# Altium PCB mimosa_simple_button.PcbDoc
Units mil, origin at the board's own origin, x right, y up, seen from the top; angles counter-clockwise.
Board outline 519.69 x 1220.47 mil, 4 copper layers (Top Layer, Layer 1, Layer 2, Bottom Layer), stack 29.856 mil thick; 30 components, 13 nets, 78 pads, 52 vias.
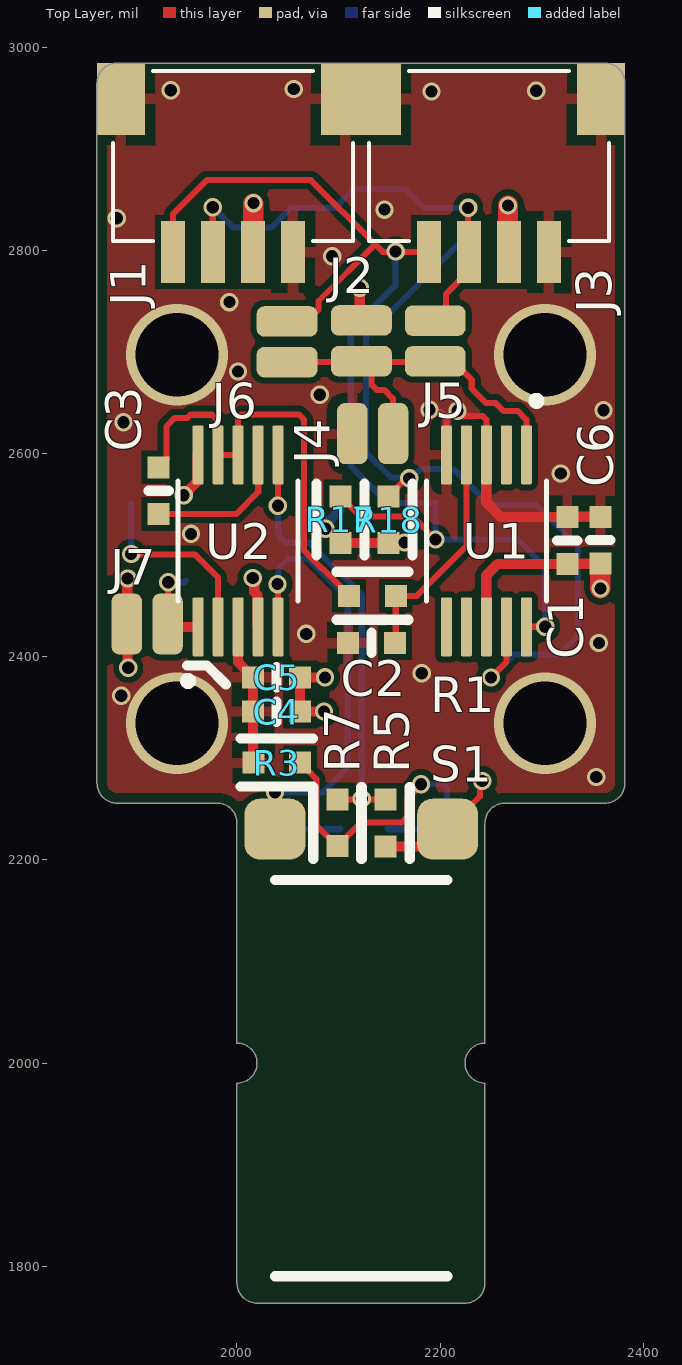
[diagram p0: Top Layer view]
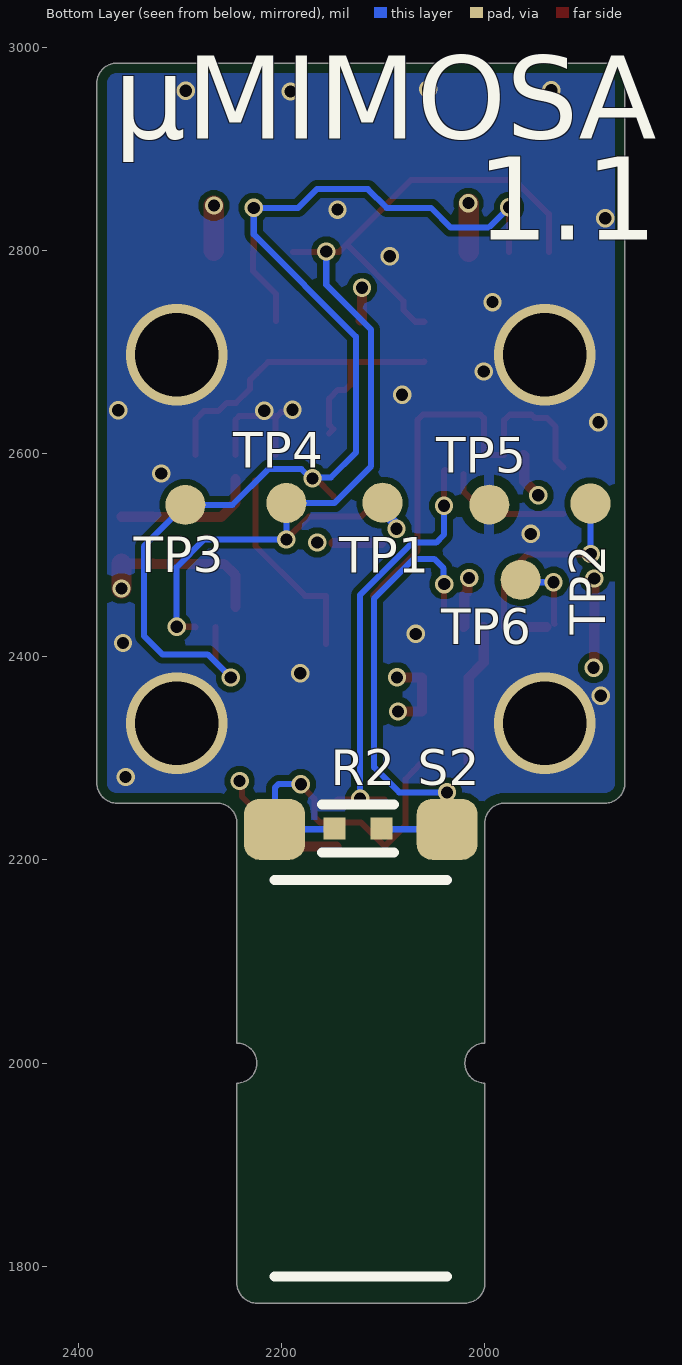
[diagram p1: Bottom Layer view, seen from below]
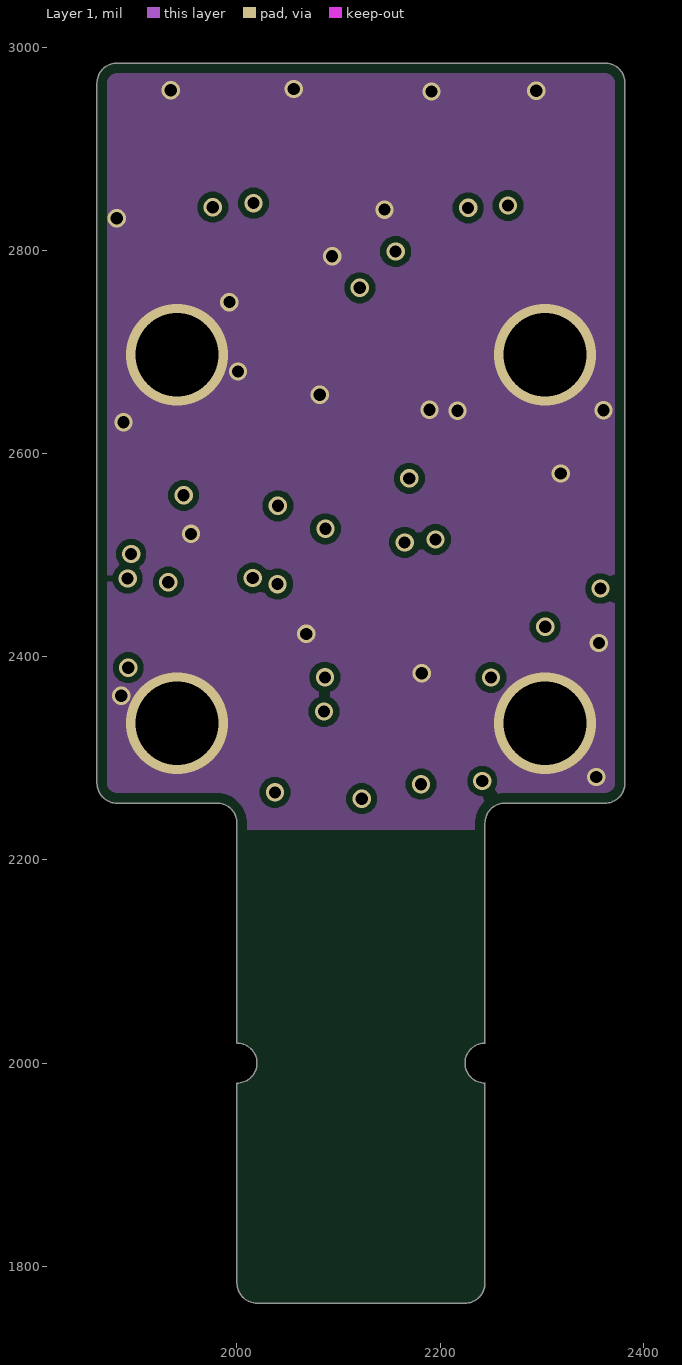
[diagram p2: Layer 1]
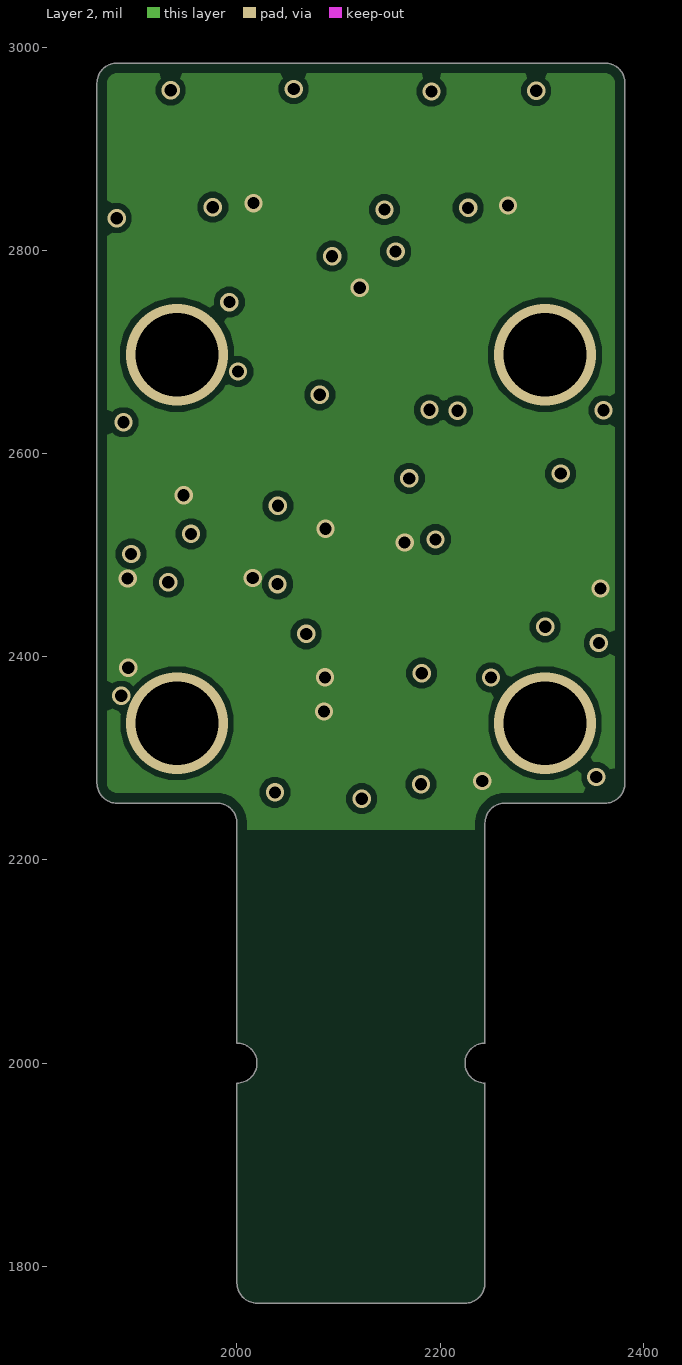
[diagram p3: Layer 2]
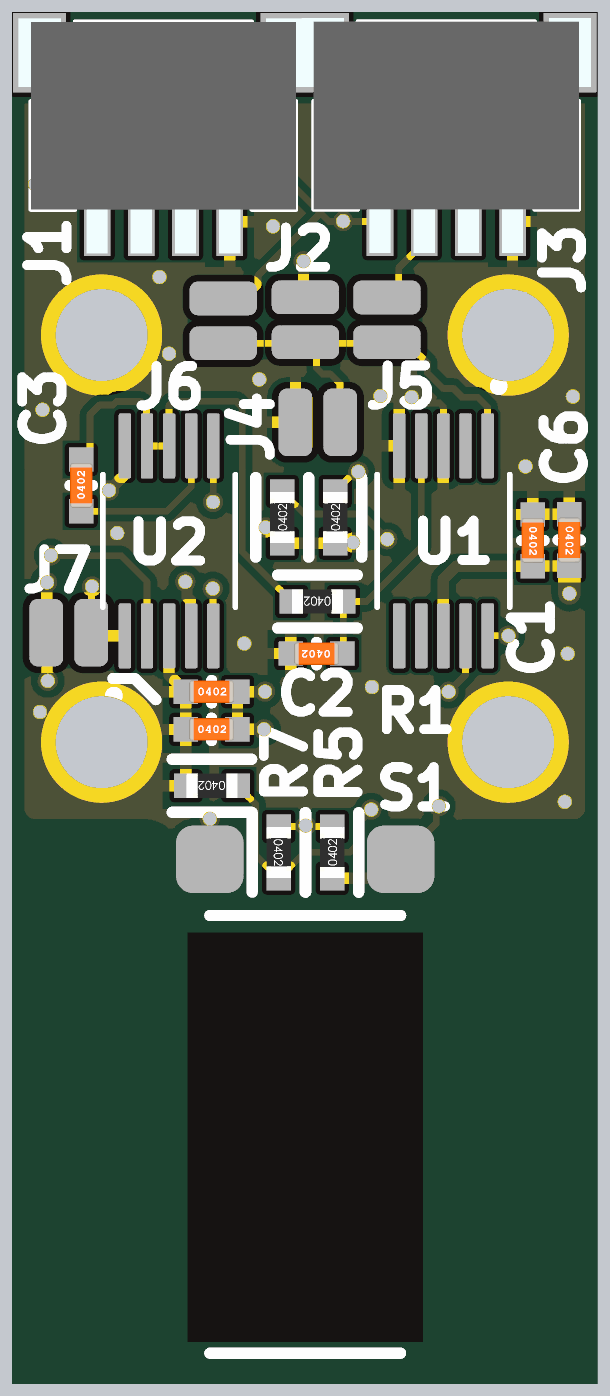
[diagram p4: 3D render of the assembled board from above, using the file's embedded part models]

## Layer stack, top to bottom
Top Solder: solder mask 0.4, Solder Resist, Dk 3.5
Top Layer: signal copper 1.4
Dielectric 2: prepreg 4.3, PP-006, Dk 4.1
Layer 1: signal copper 1.378
Dielectric 1: dielectric 15.7, FR-4, Dk 4.4
Layer 2: signal copper 1.378
Dielectric 3: prepreg 4.3, PP-006, Dk 4.1
Bottom Layer: signal copper 1.4
Bottom Solder: solder mask 0.4, Solder Resist, Dk 3.5

## Board outline
1881.89,2255.91 cw(c1881.89,2275.59) 1862.2,2275.59 1862.2,2964.57 cw(c1881.89,2964.57) 1881.89,2984.25 2362.2,2984.25 cw(c2362.2,2964.57) 2381.89,2964.57 2381.89,2275.59 cw(c2362.2,2275.59) 2362.2,2255.91 2263.78,2255.91 ccw(c2263.78,2236.22) 2244.09,2236.22 2244.09,2019.68 ccw(c2244.09,2000) 2244.09,1980.32 2244.09,1783.46 cw(c2224.41,1783.46) 2224.41,1763.78 2019.68,1763.78 cw(c2019.68,1783.46) 2000,1783.46 2000,1980.32 ccw(c2000,2000) 2000,2019.68 2000,2236.22 ccw(c1980.32,2236.22) 1980.32,2255.91

## Design rules (kind name [scope] priority, off if disabled: settings)
BoardOutlineClearance [All] p1: gap=10 ignorepadtopadclearanceinfootprint=FALSE except(0: Arc-SplitContinuation Track-SplitContinuation SMDPad-SplitContinuation THPad-SplitContinuation Via-SplitContinuation Fill-SplitContinuation Poly-SplitContinuation Region-SplitContinuation Text-SplitContinuation)
Clearance [All] p1: gap=6 ignorepadtopadclearanceinfootprint=FALSE
ComponentClearance [All] p1: gap=10 collisioncheckmode=3 verticalgap=10 showdistances=FALSE donotcheckwithout3dbody=TRUE
DiffPairsRouting [All] p1: maxlimit=8 minlimit=4 mostfreqgap=5 toplayer_minwidth=5 toplayer_maxwidth=25 toplayer_prefwidth=9 midlayer1_minwidth=5 midlayer1_maxwidth=25 midlayer1_prefwidth=9 midlayer2_minwidth=5 midlayer2_maxwidth=25 midlayer2_prefwidth=9 bottomlayer_minwidth=5 bottomlayer_maxwidth=25 bottomlayer_prefwidth=9 maxuncoupledlength=500
HoleSize [All] p1: absolutevalues=TRUE maxlimit=100 minlimit=7 maxpercent=80.000 minpercent=20.000
MinimumSolderMaskSliver [All] p1: minsoldermaskwidth=0
PolygonConnect PolygonConnect_1 [All] p1: thpad.connectstyle=Relief thpad.reliefconductorwidth=10 thpad.reliefentries=4 thpad.polygonreliefangle="90 Angle" thpad.airgapwidth=10 smdpad.connectstyle=Relief smdpad.reliefconductorwidth=10 smdpad.reliefentries=4 smdpad.polygonreliefangle="90 Angle" smdpad.airgapwidth=10 via.connectstyle=Direct via.reliefconductorwidth=10 via.reliefentries=4 via.polygonreliefangle="90 Angle" via.airgapwidth=10
RoutingVias [All] p1: holewidth=8 width=50 viastyle="Through Hole" minholewidth=7 minwidth=10 maxholewidth=100 maxwidth=200
SilkToSilkClearance [All] p1: silktosilkclearance=1
SilkToSolderMaskClearance [IsPad] p1: minsilkscreentomaskgap=1 clearancetoexposedcopper=TRUE
SolderMaskExpansion [All] p1: expansion=4 istentingtop=FALSE
Width [All] p1: maxlimit=100 minlimit=4 preferedwidth=10 toplayer_minwidth=6 toplayer_prefwidth=6 midlayer1_minwidth=10 midlayer1_maxwidth=10 midlayer2_minwidth=10 midlayer2_maxwidth=10 bottomlayer_prefwidth=6 minimp=50.000000 maximp=50.000000 favimp=50.000000
24 further rules are at their usual default settings.

## Components (designator, comment, footprint, x,y, rotation, side; value= is the part's Value field where it differs from the comment)
C1 "1µF" SMD-0402C 2325.12,2514.42 r180 top
C2 "0.10µF" SMD-0402C 2132.42,2413.56 r90 top
C3 "12pF" SMD-0402C 1922.77,2563.44 r0 top
C4 "1µF" SMD-0402C 2038.88,2346.04 r270 top
C5 "0.10µF" SMD-0402C 2038.99,2379.61 r270 top
C6 "0.10µF" SMD-0402C 2357.56,2514.73 r180 top
J1 "SM04B-SRSS-TB(LF)(SN)" 4208 1996.99,2976.03 r180 top
J2 "solder bridge jumper, open" JUMPER1P5MMX1P5MM_OPEN 2122.5,2710.95 r90 top
J3 "SM04B-SRSS-TB(LF)(SN)" 4208 2249,2976.19 r180 top
J4 "solder bridge jumper, open" JUMPER1P5MMX1P5MM_OPEN 2133.59,2619.59 r180 top
J5 "solder bridge jumper, open" JUMPER1P5MMX1P5MM_OPEN 2195.12,2710.8 r90 top
J6 "solder bridge jumper, open" JUMPER1P5MMX1P5MM_OPEN 2049.3,2709.96 r90 top
J7 "solder bridge jumper, open" JUMPER1P5MMX1P5MM_OPEN 1911.65,2432.19 r180 top
R1 "0.0" SMD-0402-RES 2133.26,2459.95 r90 top
R2 "348" SMD-0402-RES 2124.99,2230.96 r90 bottom
R3 "0.0" SMD-0402-RES 2039.2,2295.81 r90 top
R5 "348" SMD-0402-RES 2146.36,2236.37 r0 top
R7 "348" SMD-0402-RES 2098.68,2236.49 r180 top
R17 "4.7k" SMD-0402-RES 2101.86,2534.94 r0 top
R18 "4.7k" SMD-0402-RES 2148.99,2534.94 r0 top
S1 "350 Ohm, Strain Gauge Sensor" BF350-3AA-NARROW 2122.34,2190.25 r270 top
S2 "350 Ohm, Strain Gauge Sensor" BF350-3AA-NARROW 2122.13,2190.15 r270 bottom
TP1 "TP-SM-C-100" TP-SM-C-100 2100.8,2551.59 r180 bottom
TP2 "TP-SM-C-100" TP-SM-C-100 1896.08,2550.76 r90 bottom
TP3 "TP-SM-C-100" TP-SM-C-100 2294.77,2549.44 r90 bottom
TP4 "TP-SM-C-100" TP-SM-C-100 2195.36,2551.28 r90 bottom
TP5 "TP-SM-C-100" TP-SM-C-100 1995.62,2549.74 r90 bottom
TP6 "TP-SM-C-100" TP-SM-C-100 1964.73,2475.67 r90 bottom
U1 "ADS1115IDGST" SOP50P490X110-10N 2245.45,2513.99 r270 top
U2 "PGA308AIDGST" SOP50P490X110-10N 2001.07,2513.93 r90 top

## Footprints (in the part's own frame and the unit in brackets; to place one, negate y for a bottom-side part, rotate by r counter-clockwise, add the part's x,y. Pads: shape width x height; smd on the part's side, far side on the other; paste and mask are expansions set on the pad)
4208 [mm]
  rect 0.6x1.55 smd: 1(-1.475,4.515) 2(-0.475,4.515) 3(0.525,4.515) 4(1.525,4.515)
  rect 1.2x1.8 smd: 5(-2.775,0.69) 6(2.825,0.69)
  silkscreen extent -2.97,-0.01 3.03,4.24, body extent -3.25,-0.09 3.31,5.23, height 3.15
BF350-3AA-NARROW [mil]
  rrect50% 60x60 smd mask-4: 1(-40,85) 2(-40,-85)
  silkscreen extent 10,-85 400,85
JUMPER1P5MMX1P5MM_OPEN [mil]
  rrect50% 30x60 smd mask+6: 1(-20,0) 2(20,0)
SMD-0402-RES [mm]
  rect 0.55x0.55 smd: 1(0,0.584) 2(0,-0.584)
  silkscreen extent -0.6,-0.9 0.6,0.9, body extent -0.28,-0.57 0.27,0.58, height 0.41
SMD-0402C [mm]
  rect 0.55x0.55 smd: 1(0,0.584) 2(0,-0.584)
  silkscreen extent -0.25,0 0.25,0, body extent -0.25,-0.51 0.25,0.51, height 0.51
SOP50P490X110-10N [mm]
  rrect25% 1.47x0.28 smd: 1(-2.15,1) 2(-2.15,0.5) 3(-2.15,0) 4(-2.15,-0.5) 5(-2.15,-1) 6(2.15,-1) 7(2.15,-0.5) 8(2.15,0) 9(2.15,0.5) 10(2.15,1)
  silkscreen extent -3.6,-1.5 1.5,1.5
TP-SM-C-100 [mm]
  round 1 smd: 1(0,0)

## Part data
C1 C4: library part GRM155R61A105KE15D, "CAP CER 1UF 10V X5R 0402", Digi-Key Part Number=490-3890-1-ND, Manufacturer="Murata Electronics North America", Operating Temperature="-55°C ~ 85°C", Package / Case="0402 (1005 Metric)", Ratings=-, Temperature Coefficient=X5R, Tolerance=±10%, Voltage=10V, @ qty=0, Applications="General Purpose", Datasheets=http://www.murata.com/~/media/webrenewal/support/library/catalog/products/capacitor/mlcc/c02e.pdf, Factory Stock=0, Features=-, Height - Seated (Max)=-, Image=//media.digikey.com/Renders/Murata%20Renders/ZRB-SERIES-0402.jpg, Lead Spacing=-, Lead Style=-, Minimum Quantity=1, Mounting Type="Surface Mount, MLCC", Packaging="Cut Tape (CT)", Part Number=GRM155R61A105KE15D, Part Status=Active, Quantity Available=6162668, Series=GRM, Size / Dimension="0.039\" L x 0.020\" W (1.00mm x 0.50mm)", Thickness (Max)="0.022\" (0.55mm)", Unit Price (USD)=0.1
C2: library part GCM155R71C104KA55D, "CAP CER 0.1UF 16V X7R 0402", Digi-Key Part Number=490-4759-1-ND, Manufacturer="Murata Electronics North America", Operating Temperature="-55°C ~ 125°C", Package / Case="0402 (1005 Metric)", Ratings=AEC-Q200, Temperature Coefficient=X7R, Tolerance=±10%, Voltage=16V, @ qty=0, Applications=Automotive, Datasheets=http://www.murata.com/~/media/webrenewal/support/library/catalog/products/capacitor/mlcc/c03e.ashx, Factory Stock=0, Features=-, Height - Seated (Max)=-, Image=//media.digikey.com/Renders/Murata%20Renders/ZRB-SERIES-0402.jpg, Lead Spacing=-, Lead Style=-, Minimum Quantity=1, Mounting Type="Surface Mount, MLCC", Packaging="Cut Tape (CT)", Part Number=GCM155R71C104KA55D, Part Status=Active, Quantity Available=734194, Series=GCM, Size / Dimension="0.039\" L x 0.020\" W (1.00mm x 0.50mm)", Thickness (Max)="0.022\" (0.55mm)", Unit Price (USD)=0.1
C3: library part GCM1555C1H120JA16D, "CAP CER 12PF 50V NP0 0402", Digi-Key Part Number=490-12649-1-ND, Manufacturer="Murata Electronics North America", Operating Temperature="-55°C ~ 125°C", Package / Case="0402 (1005 Metric)", Ratings=AEC-Q200, Temperature Coefficient="C0G, NP0", Tolerance=±5%, Voltage=50V, @ qty=0, Applications=Automotive, Datasheets=http://www.murata.com/~/media/webrenewal/support/library/catalog/products/capacitor/mlcc/c03e.ashx, Factory Stock=0, Features=-, Height - Seated (Max)=-, Image=//media.digikey.com/Renders/Murata%20Renders/ZRB-SERIES-0402.jpg, Lead Spacing=-, Lead Style=-, Minimum Quantity=1, Mounting Type="Surface Mount, MLCC", Packaging="Cut Tape (CT)", Part Number=GCM1555C1H120JA16D, Part Status=Active, Quantity Available=29045, Series=GCM, Size / Dimension="0.039\" L x 0.020\" W (1.00mm x 0.50mm)", Thickness (Max)="0.022\" (0.55mm)", Unit Price (USD)=0.1
C5 C6: library part GRM152R61A104KE19D, "CAP CER 0.1UF 10V X5R 0402", Digi-Key Part Number=490-10008-1-ND, Manufacturer="Murata Electronics North America", Operating Temperature="-55°C ~ 85°C", Package / Case="0402 (1005 Metric)", Ratings=-, Temperature Coefficient=X5R, Tolerance=±10%, Voltage=10V, @ qty=0, Applications="General Purpose", Datasheets=http://www.murata.com/~/media/webrenewal/support/library/catalog/products/capacitor/mlcc/c02e.pdf, Factory Stock=0, Features="Derating Recommended", Height - Seated (Max)=-, Image=//media.digikey.com/Renders/Murata%20Renders/ZRB-SERIES-0402.jpg, Lead Spacing=-, Lead Style=-, Minimum Quantity=1, Mounting Type="Surface Mount, MLCC", Packaging="Cut Tape (CT)", Part Number=GRM152R61A104KE19D, Part Status=Active, Quantity Available=80241, Series=GRM, Size / Dimension="0.039\" L x 0.020\" W (1.00mm x 0.50mm)", Thickness (Max)="0.009\" (0.22mm)", Unit Price (USD)=0.16
J1 J3: library part 4208
J2 J4 J5 J6 J7: library part jumper_open
R1 R3: library part ERJ-2GE0R00X, "RES SMD 0.0OHM JUMPER 1/10W 0402", Digi-Key Part Number=P0.0JCT-ND, Manufacturer="Panasonic Electronic Components", Operating Temperature="-55°C ~ 155°C", Package / Case="0402 (1005 Metric)", Power (Watts)="0.1W, 1/10W", Supplier Device Package=0402, Temperature Coefficient=-, Tolerance=Jumper, @ qty=1500, Composition="Thick Film", Datasheets=http://industrial.panasonic.com/www-cgi/jvcr13pz.cgi?E+PZ+3+AOA0001+ERJ2GE0R00X+7+WW, Factory Stock=0, Failure Rate=-, Features="Automotive AEC-Q200", Height - Seated (Max)="0.016\" (0.40mm)", Image=//media.digikey.com/Photos/Panasonic%20Photos/ERJ-PA2-Series.jpg, Minimum Quantity=1, Number of Terminations=2, Packaging="Cut Tape (CT)", Part Number=ERJ-2GE0R00X, Part Status=Active, Quantity Available=3152483, Series=ERJ, Size / Dimension="0.039\" L x 0.020\" W (1.00mm x 0.50mm)", Unit Price (USD)=0.00384
R2 R5 R7: library part ERJ-2RKF3480X, "RES SMD 348 OHM 1% 1/10W 0402", Digi-Key Part Number=P348LCT-ND, Manufacturer="Panasonic Electronic Components", Operating Temperature="-55°C ~ 155°C", Package / Case="0402 (1005 Metric)", Power (Watts)="0.1W, 1/10W", Supplier Device Package=0402, Temperature Coefficient=±100ppm/°C, Tolerance=±1%, @ qty=1500, Composition="Thick Film", Datasheets=http://industrial.panasonic.com/www-cgi/jvcr13pz.cgi?E+PZ+3+AOA0002+ERJ2RKF3480X+7+WW, Factory Stock=0, Failure Rate=-, Features="Automotive AEC-Q200", Height - Seated (Max)="0.016\" (0.40mm)", Image=//media.digikey.com/Photos/Panasonic%20Photos/ERJ-PA2-Series.jpg, Minimum Quantity=1, Number of Terminations=2, Packaging="Cut Tape (CT)", Part Number=ERJ-2RKF3480X, Part Status=Active, Quantity Available=73385, Series=ERJ, Size / Dimension="0.039\" L x 0.020\" W (1.00mm x 0.50mm)", Unit Price (USD)=0.00408
R17 R18: library part ERJ-2GEJ472X, "RES SMD 4.7K OHM 5% 1/10W 0402", Digi-Key Part Number=P4.7KJCT-ND, Manufacturer="Panasonic Electronic Components", Operating Temperature="-55°C ~ 155°C", Package / Case="0402 (1005 Metric)", Power (Watts)="0.1W, 1/10W", Supplier Device Package=0402, Temperature Coefficient=±200ppm/°C, Tolerance=±5%, @ qty=1500, Composition="Thick Film", Datasheets=http://industrial.panasonic.com/www-cgi/jvcr13pz.cgi?E+PZ+3+AOA0001+ERJ2GEJ472X+7+WW, Factory Stock=0, Failure Rate=-, Features="Automotive AEC-Q200", Height - Seated (Max)="0.016\" (0.40mm)", Image=//media.digikey.com/Photos/Panasonic%20Photos/ERJ-PA2-Series.jpg, Minimum Quantity=1, Number of Terminations=2, Packaging="Cut Tape (CT)", Part Number=ERJ-2GEJ472X, Part Status=Active, Quantity Available=8551774, Series=ERJ, Size / Dimension="0.039\" L x 0.020\" W (1.00mm x 0.50mm)", Unit Price (USD)=0.00350
S1 S2: library part BF350-3AA
TP1 TP2 TP3 TP4 TP5 TP6: library part CMP-0484-00002-2, "Test Point, Surface Mount, Circular, Pad Diameter 1 mm", Manufacturer="No Vendor", Manufacturer 1=ALTIUM, Manufacturer 2="No Vendor", Manufacturer Part Number 1=TP-SM-C-100, Manufacturer Part Number 2=TP-SM-C-100, PartNumber=TP-SM-C-100
U1: library part ADS1015IDGST, "12-Bit, 3.3kSPS, 4-Ch Delta-Sigma ADC With PGA, Oscillator, VREF, Comparator and I2C Interface 10-VSSOP -40 to 125", Package="VSSOP-10 Texas Instruments", Availability=Good, DigiKey-Purchase-URL=https://snapeda.com/shop?store=DigiKey&id=425936, MF="Texas Instruments", Mouser-Purchase-URL=https://snapeda.com/shop?store=Mouser&id=425936, MP=ADS1015IDGST, Price=None, SnapEDA_Link=https://www.snapeda.com/parts/ADS1015IDGST/Texas%20Instruments/view-part/425936/?ref=snap, Texas_Instruments-Purchase-URL=https://snapeda.com/shop?store=Texas+Instruments&id=425936
U2: Package=None, Availability=Unavailable, MP=PGA308AIDGST, Price=None

## Via types
v1: diameter 18, hole 12, Top Layer to Bottom Layer, tented both sides, 48 vias
v2: diameter 100, hole 82, Top Layer to Bottom Layer, 4 vias

## Nets (pads, with @x,y where several pads share a name; then routed paths per layer and width w, separated by ;. In a path a pad name is that pad's centre, name@x,y a point inside that pad or via, vN(x,y) a via of type N, cw(c..) or ccw(c..) an arc to the next point about the centre after c; other vN are vias at no path point)
GND: C1.2 C2.1 C4.2 C5.2 C6.2 J1.1 J1.5 J1.6 J3.1 J3.5 J3.6 J4.2 R3.1 TP5.1 U1.3 U1.5 U2.3 | length 414.5
  Top Layer w6: R3.1@2015.88,2296.13 R3.1 ; C5.2@2015.88,2379.5 C5.2 ; v1(2189.38,2643.03) 2191.68,2640.73 2200.48,2640.73 2204.39,2636.82 ; U1.5 2206.29,2598.84 2206.29,2634.93 2204.39,2636.82 ; U1.3 2245.45,2633.31 2241.94,2636.82 2204.39,2636.82 ; C1.2@2325.8,2538.43 C1.2@2326.5,2537.73
  Top Layer w10: U2.3 2001.07,2394.52 C5.2 ; R3.1@2015.88,2296.13 C4.2 C5.2@2015.88,2379.5 ; U1.3@2245.31,2574.89 2245.31,2551.89 2259.77,2537.42 C1.2 ; C1.2@2326.5,2537.73 C6.2
  other v1: 2353.62,2281.53 1886.02,2361.52 2181.77,2383.76 2356.16,2413.45 2068.07,2422.5 1954.77,2520.92 2318.59,2580.3 1888.28,2630.79 2217.11,2642.06 2360.79,2642.59 2081.46,2657.83 2001.03,2680.69 1992.48,2749.02 2093.66,2794.23 1881.62,2831.66 2145.11,2840.05 2191.39,2956.38 1934.71,2957.48 2294.49,2956.99 2055.83,2958.84
  other v2: 1940.94,2334.65 2303.15,2334.65 1940.94,2697.33 2303.15,2697.33
NetC2_2: C2.2 R1.2 U1.4 | length 201.9
  Top Layer w6: C2.2@2156.26,2412.81 R1.2 2176.9,2459.95 2225.77,2508.81 2225.77,2572.99 U1.4@2226.32,2573.55
NetC3_1: C3.1 R1.1 U2.8 U2.9 | length 431
  Top Layer w6: C3.1 1930.6,2594.26 1930.6,2626.7 1938.94,2635.04 1951.14,2635.04 1954.29,2638.19 1975.53,2638.19 1981.01,2632.71 1981.01,2619.14 U2.9@1981.29,2618.87 ; U2.9 U2.8 2001.07,2634.77 2004.58,2638.29 2061.05,2638.29 2066.13,2633.21 2066.13,2504.52 2102.43,2468.21 2102.43,2467.77 R1.1
NetC3_2: C3.2 U2.7 | length 124.8
  Top Layer w6: C3.2 1999.07,2540.44 2020.9,2562.26 U2.7@2020.9,2579.94
NetJ2_1: J2.1 J4.1 J5.1 J6.1 U1.1 | length 375.2
  Top Layer w6: J6.1@2059.66,2690.45 2060.04,2690.07 2132.45,2690.07 2132.45,2667.73 2137.57,2662.61 2144.72,2662.61 2153.35,2653.98 2153.35,2628.19 2149.17,2624.01 J4.1 ; J2.1@2132.91,2690.07 2213.29,2690.07 2224.37,2678.99 2224.65,2678.99 2231.04,2672.59 2231.04,2663.77 2244.99,2649.82 2254.21,2649.82 2262.11,2641.92 2276.22,2641.92 2284.82,2633.32 U1.1
NetJ7_1: J7.1 TP6.1 U2.1 | length 81.9
  Top Layer w6: J7.1 1932.03,2432.58 1932.03,2472.96 v1(1932.41,2473.34)
  Top Layer w10: J7.1@1939.34,2429.38 1961.6,2429.38 U2.1
  Bottom Layer w6: v1(1932.41,2473.34) 1948.14,2473.34 TP6.1@1949.76,2474.96
NetR2_1: R2.1 R3.2 R7.1 S2.2 | length 336.3
  Top Layer w6: R3.2@2062.33,2295.43 2062.58,2295.43 2070.03,2287.98 2070.03,2287.74 2078.11,2279.66 2078.11,2234.06 R7.1 2121.86,2236.66 2162.04,2236.66 2167.76,2242.39 2167.76,2260.44 v1@2181.38,2274.05
  Bottom Layer w6: R2.1 2148.8,2230.15 2204.37,2230.15 S2.2@2204.99,2230.77 ; v1(2181.14,2274.55) 2203.22,2274.55 2206.74,2271.03 S2.2@2206.74,2234.88
PGA_1W: TP2.1 U2.2 | length 193.4
  Top Layer w6: v1(1895.79,2501.1) 1896.25,2500.64 1958.31,2500.64 1981.38,2477.57 U2.2
  Bottom Layer w6: v1(1895.79,2501.1) 1895.94,2501.24 1895.94,2550.62 TP2.1
SCL: J1.4 J3.4 J6.2 R17.1 TP4.1 U1.10 | length 1117.3
  Top Layer w6: J1.4 1936.93,2835.66 1970.42,2869.15 2072.77,2869.15 2135.99,2805.93 ; J6.2@2059.71,2729.66 2068.54,2729.66 2080.2,2741.31 2080.2,2750.14 2135.99,2805.93 ; R17.1 2121.94,2537.86 2172.94,2537.86 v1(2195.38,2515.42) ; J3.4 2156.12,2798.43 2143.49,2798.43 2135.99,2805.93 ; U1.10@2284.74,2429.05 2285.17,2429.48 v1(2303.33,2429.48)
  Bottom Layer w6: v1(2156.12,2798.82) 2156.12,2766.11 2111.98,2721.97 2111.98,2587.57 2148.26,2551.28 TP4.1 v1(2195.38,2515.42) ; v1(2195.38,2515.42) 2276.14,2515.42 2303.33,2488.23 v1(2303.33,2429.48)
SDA: J1.3 J3.3 J5.2 R18.1 TP3.1 U1.9 | length 1259.7
  Top Layer w6: v1(1976.17,2842.46) 1976.17,2798.41 J1.3 ; R18.1 2166.6,2575.55 v1(2169.58,2575.55) ; J5.2@2205.54,2730.49 2205.54,2756.96 2228.31,2779.73 J3.3 2227.51,2799.23 v1(2227.51,2841.78) ; v1(2250.06,2379.58) 2265.1,2394.61 U1.9 U1.9
  Bottom Layer w6: v1(1976.17,2842.46) 1996.27,2822.37 2033.62,2822.37 2053.03,2841.78 2096.65,2841.78 2115.11,2860.23 2165.43,2860.23 2183.89,2841.78 v1(2227.51,2841.78) 2227.51,2815.62 2126.99,2715.11 2126.99,2600.99 2151.58,2576.4 2168.73,2576.4 v1(2169.58,2575.55) 2171.38,2575.55 2180.51,2584.68 2213.15,2584.68 2248.39,2549.44 TP3.1 2335.65,2508.56 2335.65,2420.55 2317.44,2402.35 2272.83,2402.35 v1(2250.06,2379.58)
SG_OUT_N: R5.1 R7.2 U2.6 | length 420.1
  Top Layer w6: U2.6@2039.49,2583.86 2040.33,2583.01 2040.33,2548.67 v1(2040.23,2548.56) ; R7.2 2144.99,2259.49 R5.1@2146.41,2258.07
  Bottom Layer w6: v1(2040.23,2548.56) 2040.23,2520.14 2048.05,2512.32 2071.3,2512.32 2122.77,2460.85 v1(2122.77,2260.28)
SG_OUT_P: R2.2 S1.2 S2.1 U2.5 | length 436.6
  Top Layer w6: U2.5@2039.63,2446.93 2040.2,2447.5 2040.2,2471.24 v1(2039.97,2471.47)
  Bottom Layer w6: v1(2037.35,2266.47) 2084.38,2266.47 2109.03,2291.12 2109.03,2457.39 2070.14,2496.28 2049.99,2496.28 2040.65,2486.95 2040.65,2472.16 v1(2039.97,2471.47) ; S2.1@2043.71,2232.18 2045.73,2230.15 2101.17,2230.15 R2.2
VDD_3V3: C1.1 C4.1 C5.1 C6.1 J1.2 J2.2 J3.2 J7.2 R5.2 R17.2 R18.2 S1.1 TP1.1 U1.8 U2.4 U2.10 | length 773
  Top Layer w6: S1.1 2207.34,2230.68 2239.1,2262.44 2239.1,2275.32 v1(2241.4,2277.61) ; J3.2@2266.72,2799.39 J3.2
  Top Layer w10: v1(1892.35,2476.99) 1892,2476.64 1892,2432.54 J7.2 1892.3,2431.54 1892.3,2389.89 v1(1892.95,2389.23) ; v1(1947.49,2558.92) 1961.19,2572.62 1961.19,2598.06 U2.10 ; v1(2015.49,2477.54) 2017.02,2476.01 2017.02,2463.99 2020.24,2460.77 2020.24,2429.79 U2.4 ; J1.2 J1.2@2015.96,2798.57 ; v1@2015.96,2846.17 v1(2016.25,2846.46) ; C4.1@2061.96,2346.06 v1(2085.58,2346.09) ; C4.1@2061.93,2346.09 2061.93,2379.55 C5.1 ; C5.1 v1@2086.49,2379.63 ; R17.2 R18.2 ; v1(2120.89,2763.08) 2120.89,2732.56 J2.2 ; R5.2 2190.46,2213.37 S1.1 ; U1.8@2245.36,2448.8 2245.36,2480.05 2256.73,2491.42 C1.1 ; C1.1@2326.74,2491.75 2326.91,2491.58 2357.41,2491.58 C6.1 C6.1 ; v1@2357.62,2467.11 v1(2357.69,2467.05)
  Top Layer w20: J1.2@2015.96,2798.57 v1@2015.96,2846.17 ; J3.2@2266.72,2799.39 v1(2266.72,2844.12) ; v1@2357.62,2467.11 C6.1
  Bottom Layer w10: v1(2087.02,2525.9) 2088.55,2527.43 2088.55,2531.39 2100.8,2543.64 TP1.1
  other v1: 2086.51,2379.66 2164.98,2512.51
pads on no net: U1.2 U1.6 U1.7

## Polygon pours and split planes (outlines as drawn)
GND on Layer 1 "NONET_L-01_P-001" (solid, pour order 0): 1838.08,3030.99 1838.08,2229.56 2423.34,2229.56 2423.34,3030.99
VDD_3V3 on Layer 2 "NONET_L-01_P-001" (solid, pour order 1): 1838.08,3030.99 1838.08,2229.56 2423.34,2229.56 2423.34,3030.99
GND on Top Layer "NONET_L-01_P-001" (solid, pour order 3): 1838.08,3030.27 1838.08,2228.84 2423.34,2228.84 2423.34,3030.27
GND on Bottom Layer "NONET_L-01_P-001" (solid, pour order 2): 1838.08,3030.27 1838.08,2228.84 2423.34,2228.84 2423.34,3030.27

## Silkscreen, mask and mechanical layers (free items; w line width, h text height)
Top Overlay:
  lines w10: 1951.03,2391.33 1970.49,2391.33 1989.29,2372.53
Bottom Overlay:
  text "μMIMOSA" at 2365.34,2882.9 h140
  text "1.1" at 2008.13,2783.47 h140
Mechanical 1:
  circle w0.5: c2000,1421.26 r39.37
  circle w0.5: c1409.45,2000 r64.96
  circle w0.5: c2000,2578.74 r39.37
  circle w0.5: c2311.02,2000 r64.96
Outline:
  circle w0.5: c2303.15,2334.65 r39.37
  circle w0.5: c1940.94,2334.65 r39.37
  circle w0.5: c1940.94,2697.33 r39.37
  circle w0.5: c2303.15,2697.33 r39.37
  lines w0.5: 1862.2,2275.59 ccw(c1881.89,2275.59) 1881.89,2255.91 1980.32,2255.91 cw(c1980.32,2236.22) 2000,2236.22 2000,2019.68 cw(c2000,2000) 2000,1980.32 2000,1783.46 ccw(c2019.68,1783.46) 2019.68,1763.78 2224.41,1763.78 ccw(c2224.41,1783.46) 2244.09,1783.46 2244.09,1980.32 cw(c2244.09,2000) 2244.09,2019.68 2244.09,2236.22 cw(c2263.78,2236.22) 2263.78,2255.91 2362.2,2255.91 ccw(c2362.2,2275.59) 2381.89,2275.59 2381.89,2964.57 ccw(c2362.2,2964.57) 2362.2,2984.25 1881.89,2984.25 ccw(c1881.89,2964.57) 1862.2,2964.57 1862.2,2275.59